# EAGLE board max21100 (EAGLE 6.5.0)
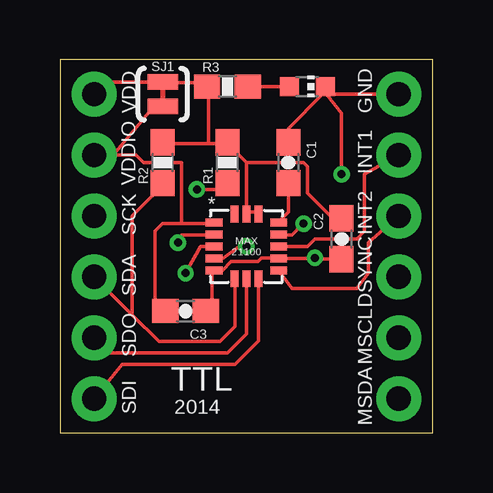
[diagram p0: board, top side]
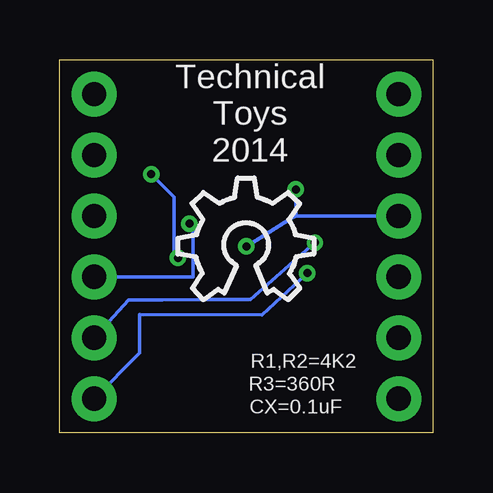
[diagram p1: board, bottom side, seen from below]

Size 15.56 x 15.56 mm. Coordinates in mm from the lower left corner, seen from the top.
Outline: 0,0 15.56,0 15.56,15.56 0,15.56 0,0
Copper layers (1*16): Top 0.0356mm / dielectric 1.5011mm / Bottom 0.0356mm
Design rules "LaenPCBOrder *": minimum track width 6mil, minimum drill 13mil, track to track 6mil, track to pad 6mil, pad to pad 6mil, via to via 6mil, smd to smd 6mil, copper to edge 15mil, drill to drill 6mil, minimum pad ring 7mil, minimum via ring 7mil, stop-mask expansion 2mil, vias tented up to drill 25mil, thermal gap 10mil
Net classes: 0 default: width 0.152 mm, clearance 0.152 mm

## Footprints (pad centres in the part's own frame; a part is rotated, then mirrored left to right if it is on the bottom)
0603-CAP = smd 1.1 x 1: 1 -0.85,0; 2 0.85,0
1X06 = drill 1.016 pad 1.88: 1 0,0; 2 2.54,0; 3 5.08,0; 4 7.62,0; 5 10.16,0; 6 12.7,0
CHIP-LED0603 = smd 0.8 x 0.8: A 0,-0.75; C 0,0.75
0603-RES = smd 1.1 x 1: 1 -0.85,0; 2 0.85,0
SJ_2S-TRACE = smd 0.635 x 1.27: 1 -0.508,0; 2 0.508,0
MAX21100 = smd 0.7 x 0.33: 1 -1.35,1; 2 -1.35,0.5; 3 -1.35,0; 4 -1.35,-0.5; 5 -1.35,-1; 9 1.35,-1; 10 1.35,-0.5; 11 1.35,0; 12 1.35,0.5; 13 1.35,1 | smd 0.33 x 0.7: 6 -0.5,-1.35; 7 0,-1.35; 8 0.5,-1.35; 14 0.5,1.35; 15 0,1.35; 16 -0.5,1.35

## Placement (x,y rotation side)
C1  0.1uF  [0603-CAP]  9.53,11.27 270 top
C2  0.1uF  [0603-CAP]  11.75,8.1 90 top
C3  0.1uF  [0603-CAP]  5.24,5.08 180 top
JP1  JP1  [1X06]  1.43,14.13 270 top
JP2  JP1  [1X06]  14.13,14.13 270 top
LED1  RED  [CHIP-LED0603]  10.32,14.45 270 top
R1  4K7  [0603-RES]  6.99,11.27 90 top
R2  4K7  [0603-RES]  4.29,11.27 90 top
R3  360R  [0603-RES]  6.99,14.45 0 top
SJ1  SOLDERJUMPERTRACE  [SJ_2S-TRACE]  4.29,14.13 270 top
U$1  MAX21100  [MAX21100]  7.78,7.78 0 top
U$2  [OSHW_8X200_NOTEXT]  10.64,5.56 0 bottom

## Library data of the parts
C1-C3 R1-R3 SJ1 = SparkFun-Passives
JP1 JP2 U$1 = max21100
LED1 = breakouts
U$2 = ohw-logo

## Nets
CS: JP1.6 U$1.8
DSYNC: JP2.4 U$1.12
GND: C1.1 C2.1 C3.1 JP2.1 LED1.C U$1.5 U$1.10
INT1: JP2.2 U$1.11
INT2: JP2.3 U$1.9
MST_SCL: JP2.5 U$1.2
MST_SDA: JP2.6 U$1.3
N$1: LED1.A R3.2
REGD: C1.2 U$1.13
SA0_SDO: JP1.5 U$1.7
SDA_CLK: JP1.3 R1.1 U$1.4
SDA_SDI: JP1.4 R2.1 U$1.6
VDD: C2.2 JP1.1 R1.2 R2.2 R3.1 SJ1.1 U$1.14 U$1.15
VDDIO: C3.2 JP1.2 SJ1.2 U$1.1

## Tracks (layer width: path | path; a pad name or v marks a point on that pad's centre or on a via)
CS
  Top 0.152: JP1.6 2.6,2.86 7.3,2.86 8.28,3.83 U$1.8
DSYNC  (via drill 0.33)
  Top 0.152: v10.16,8.73 9.68,8.26 9.05,8.26 U$1.12
  Bottom 0.152: v10.16,8.73 10,8.57 10,6.51 JP2.4
GND  (via drill 0.33)
  Top 0.152: U$1.10 9.11,7.3 8.41,7.3 8.26,7.14 7.14,7.14 6.78,6.78 U$1.5 | U$1.5 6.35,6.7 | 9.53,12.22 C1.1 9.53,12.7 10.95,14.13 LED1.C 11.11,14.13 | 11.11,14.13 JP2.1 | 9.21,7.3 U$1.10 | 11.75,7.3 C2.1 10.85,7.25 v10.64,7.3 10.77,7.28 U$1.10 | 11.11,14.13 11.75,13.34 v11.75,10.79 | C3.1 6.19,5.08 6.35,5.24 6.35,6.67 U$1.5
  Bottom 0.152: v11.75,10.79 10.79,9.84 10.79,7.46 v10.64,7.3
INT1
  Top 0.152: U$1.11 10.32,7.78 10.64,8.1 12.38,8.1 12.7,8.41 12.7,10.79 JP2.2
INT2
  Top 0.152: JP2.3 12.86,7.94 12.86,6.67 12.38,6.03 9.68,6.03 9.21,6.67 U$1.9
MST_SCL  (via drill 0.33)
  Top 0.152: v4.92,7.94 5.08,8.26 6.35,8.26 U$1.2
  Bottom 0.152: JP2.5 12.7,5.56 11.27,5.56 9.68,5.56 7.62,5.56 v4.92,7.94
MST_SDA  (via drill 0.33)
  Top 0.152: v5.24,6.67 5.87,7.78 U$1.3
  Bottom 0.152: JP2.6 12.23,3.34 12.23,4.93 7.14,4.92 v5.24,6.67
N$1
  Top 0.152: R3.2 LED1.A
REGD
  Top 0.152: C1.2 9.53,9.21 9.21,8.89 U$1.13
SA0_SDO
  Top 0.152: U$1.7 7.78,4.13 6.99,3.33 2.06,3.33 JP1.5
SDA_CLK  (via drill 0.33)
  Top 0.152: v7.78,7.78 7.46,7.78 6.83,7.3 6.51,7.3 U$1.4 | R1.1 6.99,10.16 v5.71,10.16
  Bottom 0.152: v7.78,7.78 6.03,8.89 5.71,9.05 | JP1.3 5.71,9.05 | v5.71,10.16 5.71,9.05
SDA_SDI
  Top 0.152: U$1.6 7.3,6.51 7.3,4.45 6.67,3.81 4.13,3.81 3.02,4.92 | 3.02,4.92 3.02,9.05 4.29,10.32 R2.1 | JP1.4 3.02,4.92
VDD
  Top 0.152: 7.78,9.21 8.26,9.21 U$1.14 | 7.78,11.27 7.78,9.21 | 6.99,12.06 7.78,11.27 | 7.78,9.21 U$1.15 | 7.78,11.27 10.16,11.27 10.32,11.11 10.32,10 11.27,9.05 C2.2 | 6.99,12.06 6.19,12.06 | 6.19,12.06 4.29,12.06 R2.2 | 6.99,12.06 R1.2 | 6.19,12.06 6.19,14.13 R3.1 5.87,14.45 5.71,14.61 4.32,14.61 SJ1.1 2.1,14.64 2.06,14.61 1.91,14.61 JP1.1
VDDIO
  Top 0.152: 5.08,8.73 4.29,8.73 3.97,8.41 3.97,5.08 C3.2 | 5.08,8.73 6.35,8.73 U$1.1 | JP1.2 2.22,11.59 | SJ1.2 3.94,13.62 2.22,11.59 | 2.22,11.59 3.17,11.59 3.49,11.27 5.08,11.27 5.08,8.73

## Text on the board
tPlace: VDDIO | VDD | GND | INT1 | SCK | INT2 | SDA | DSYNC | SDO | MSCL | TTL | SDI | 2014 | MSDA
bPlace: Technical / Toys / 2014 | R1,R2=4K2 | R3=360R | CX=0.1uF